# Altium PCB PCB1.PcbDoc
Units mil, origin at the board's own origin, x right, y up, seen from the top; angles counter-clockwise.
Board outline 2185.03 x 2735.03 mil, 4 copper layers (Top Layer, 5V, GND, Bottom Layer), stack 23.756 mil thick; 39 components, 28 nets, 132 pads, 51 vias.
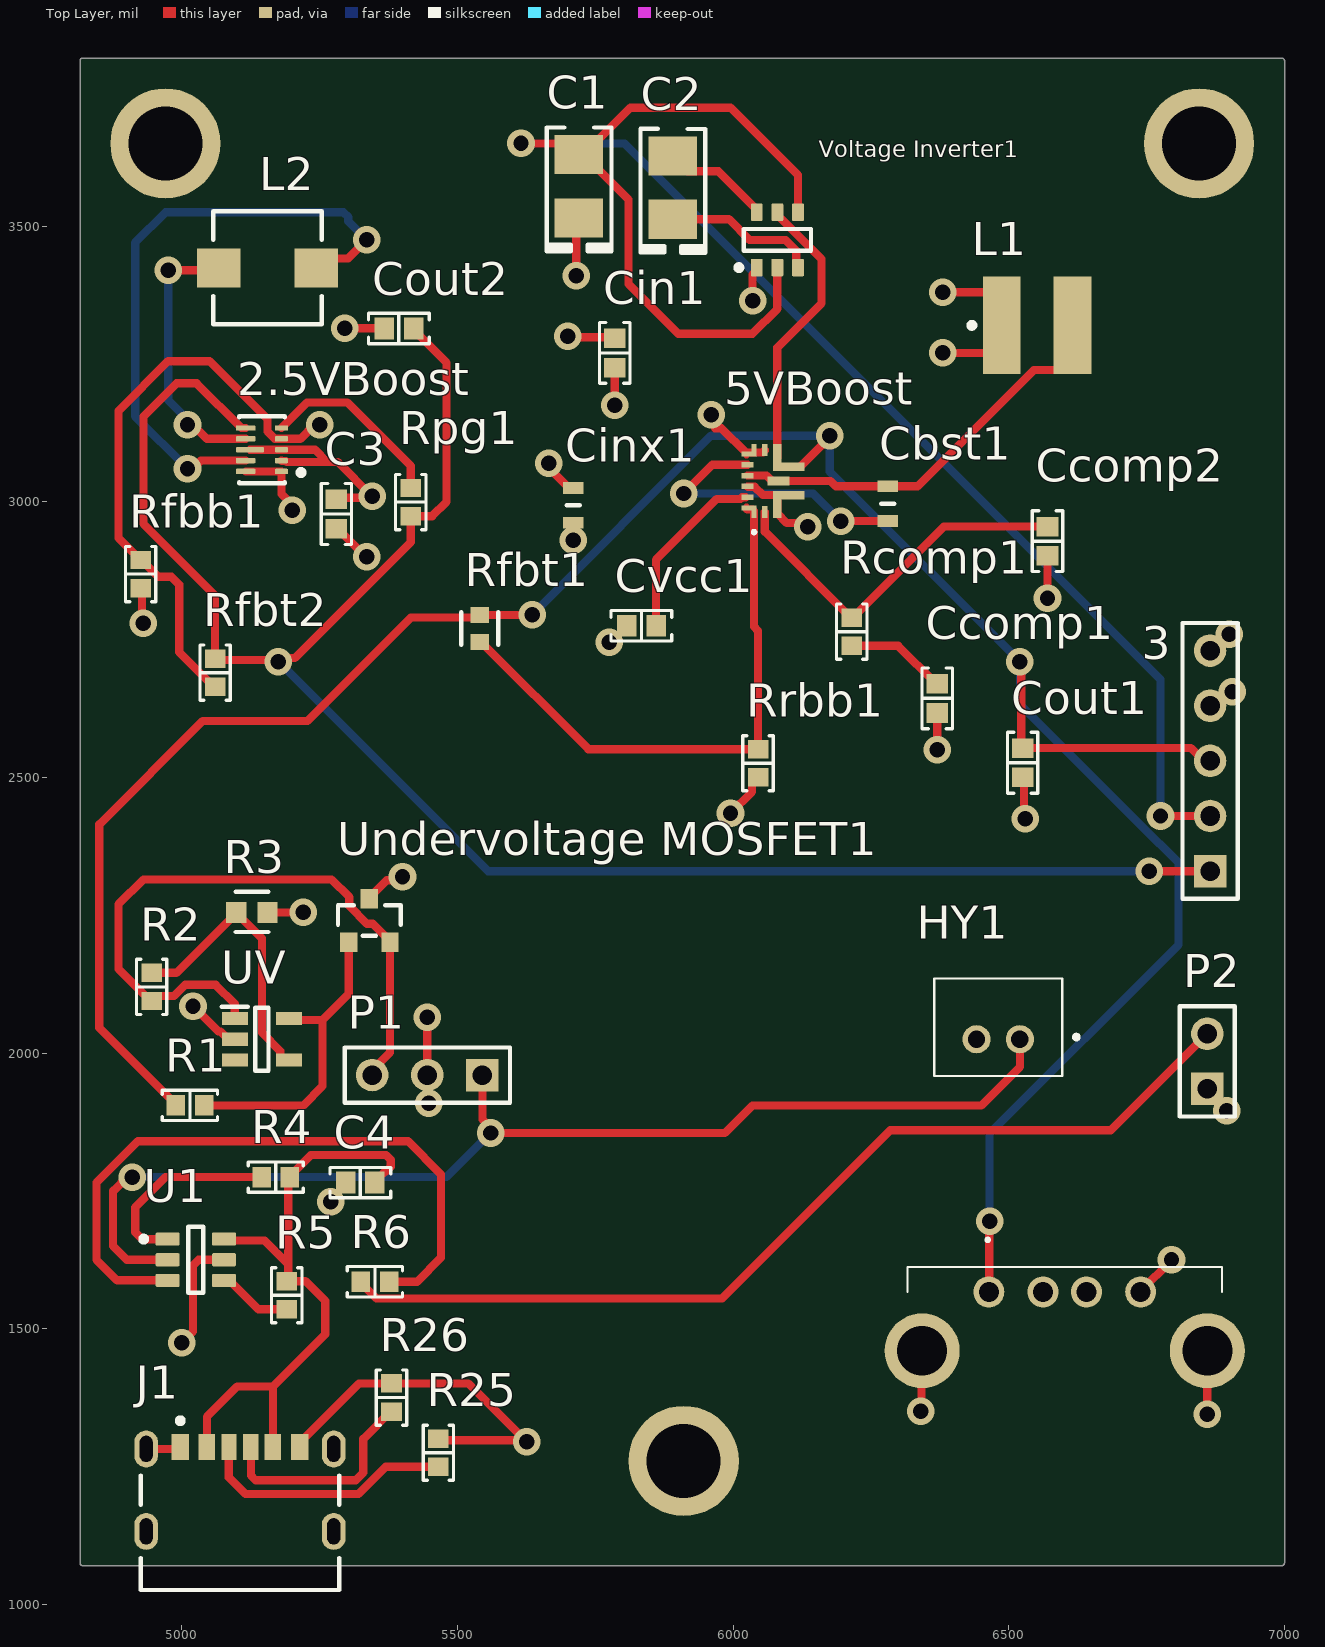
[diagram p0: Top Layer view]
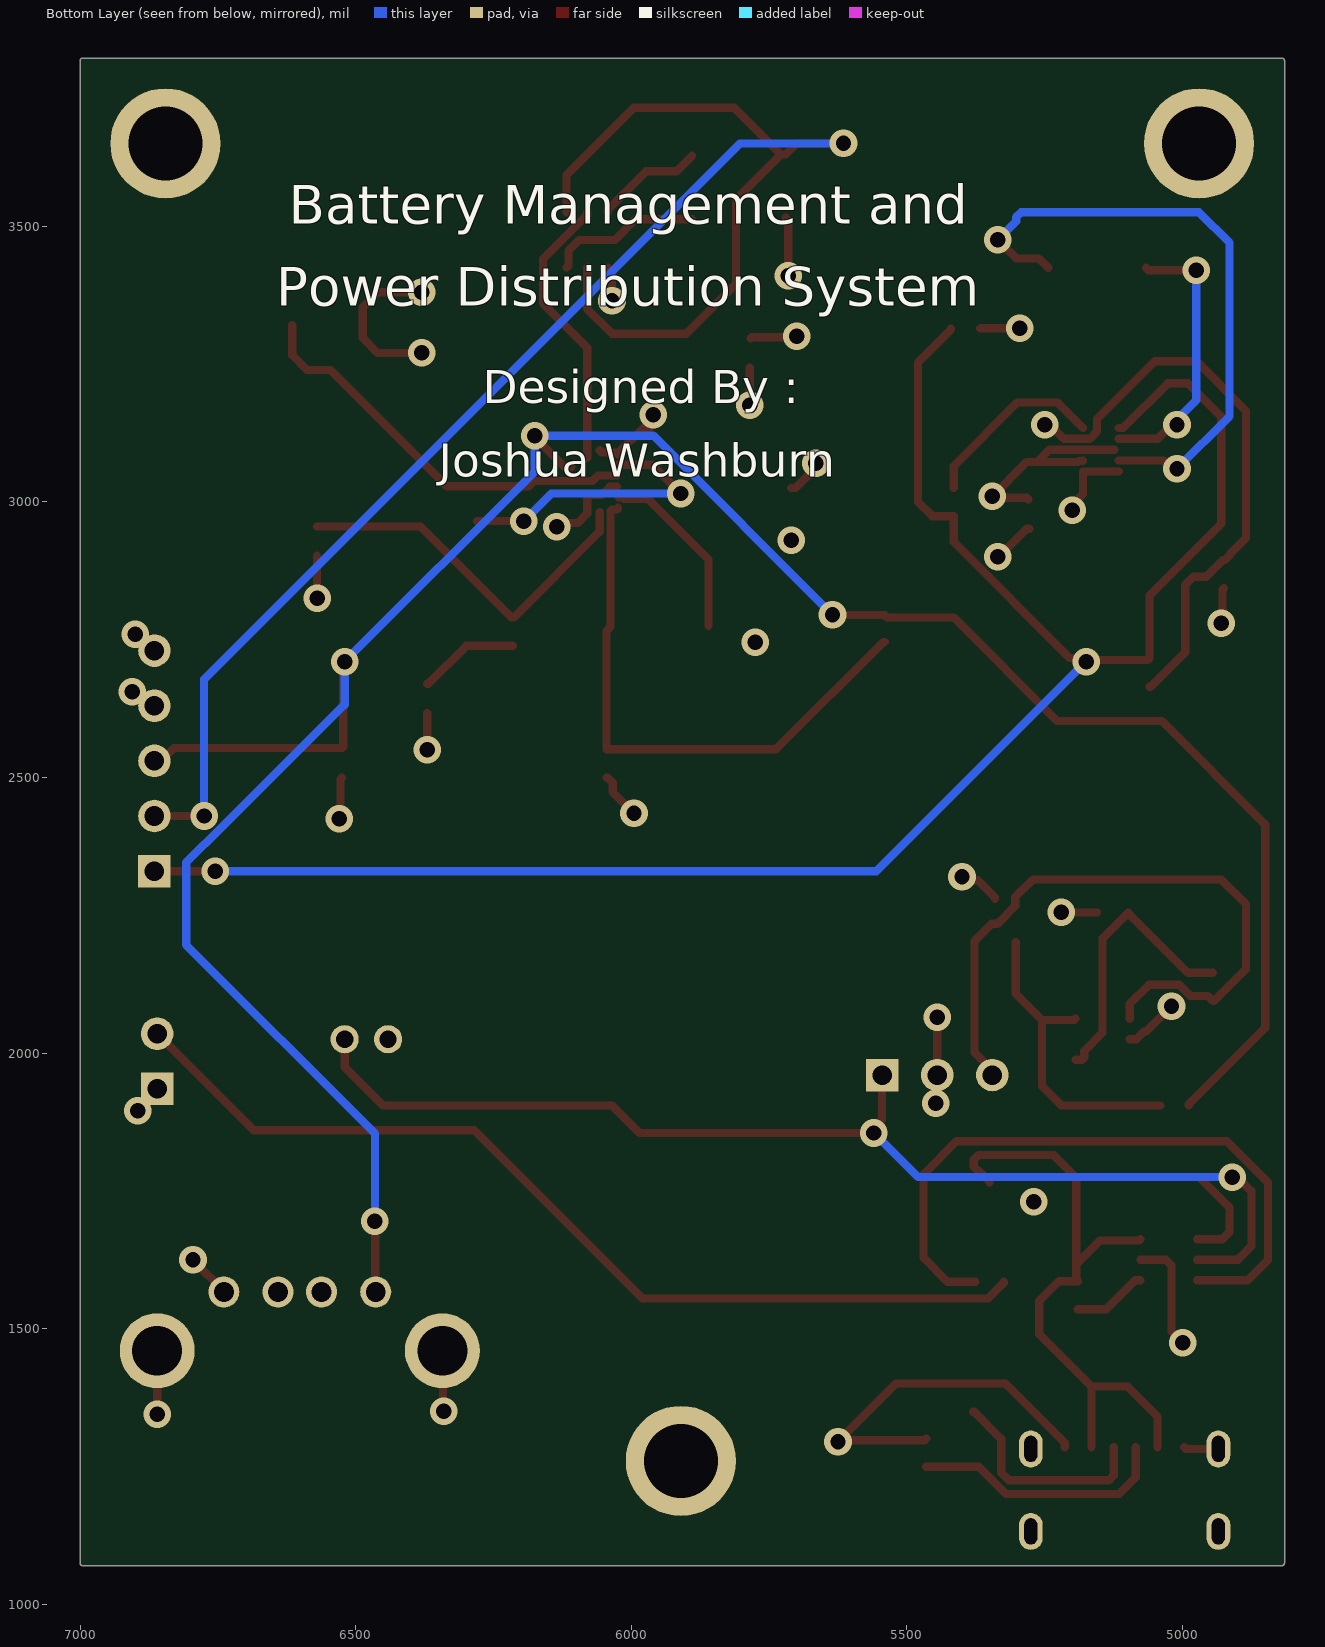
[diagram p1: Bottom Layer view, seen from below]
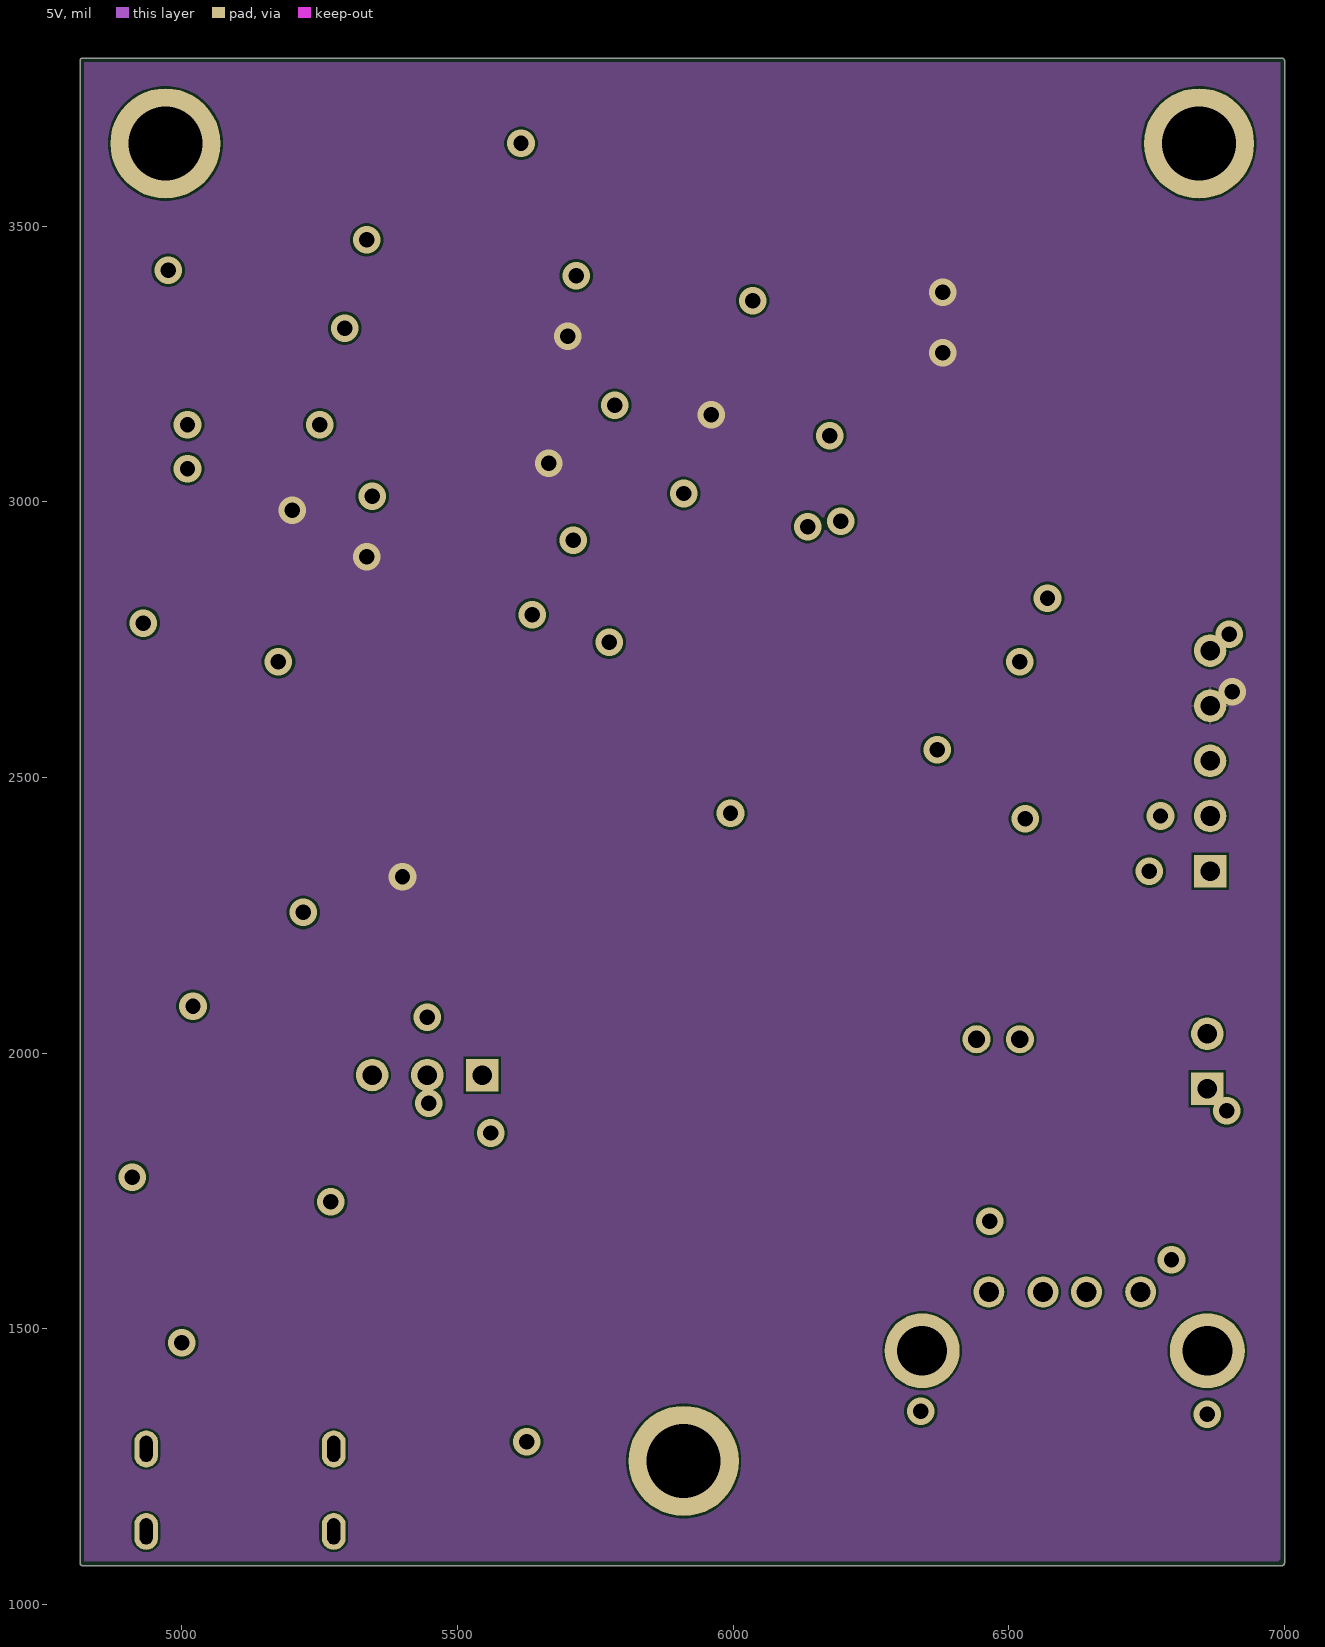
[diagram p2: 5V]
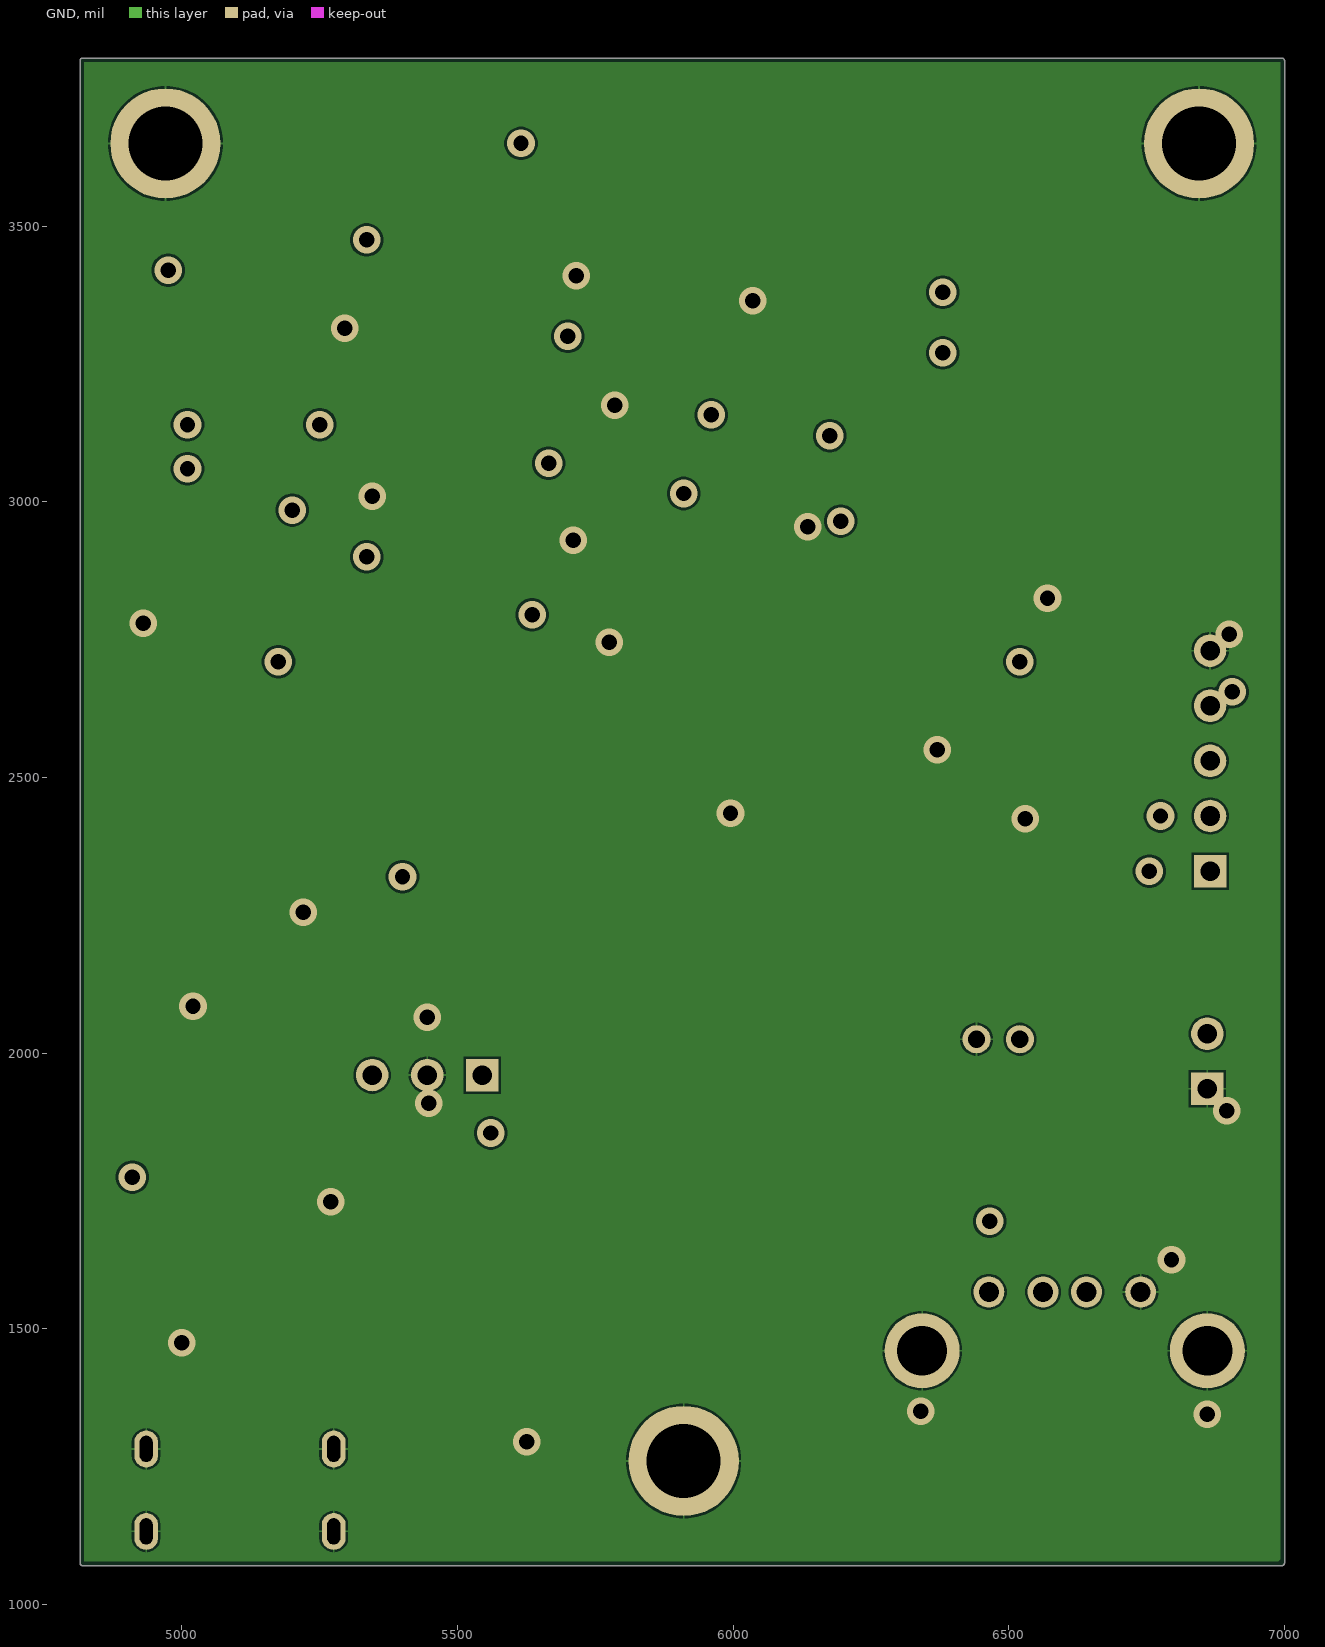
[diagram p3: GND]
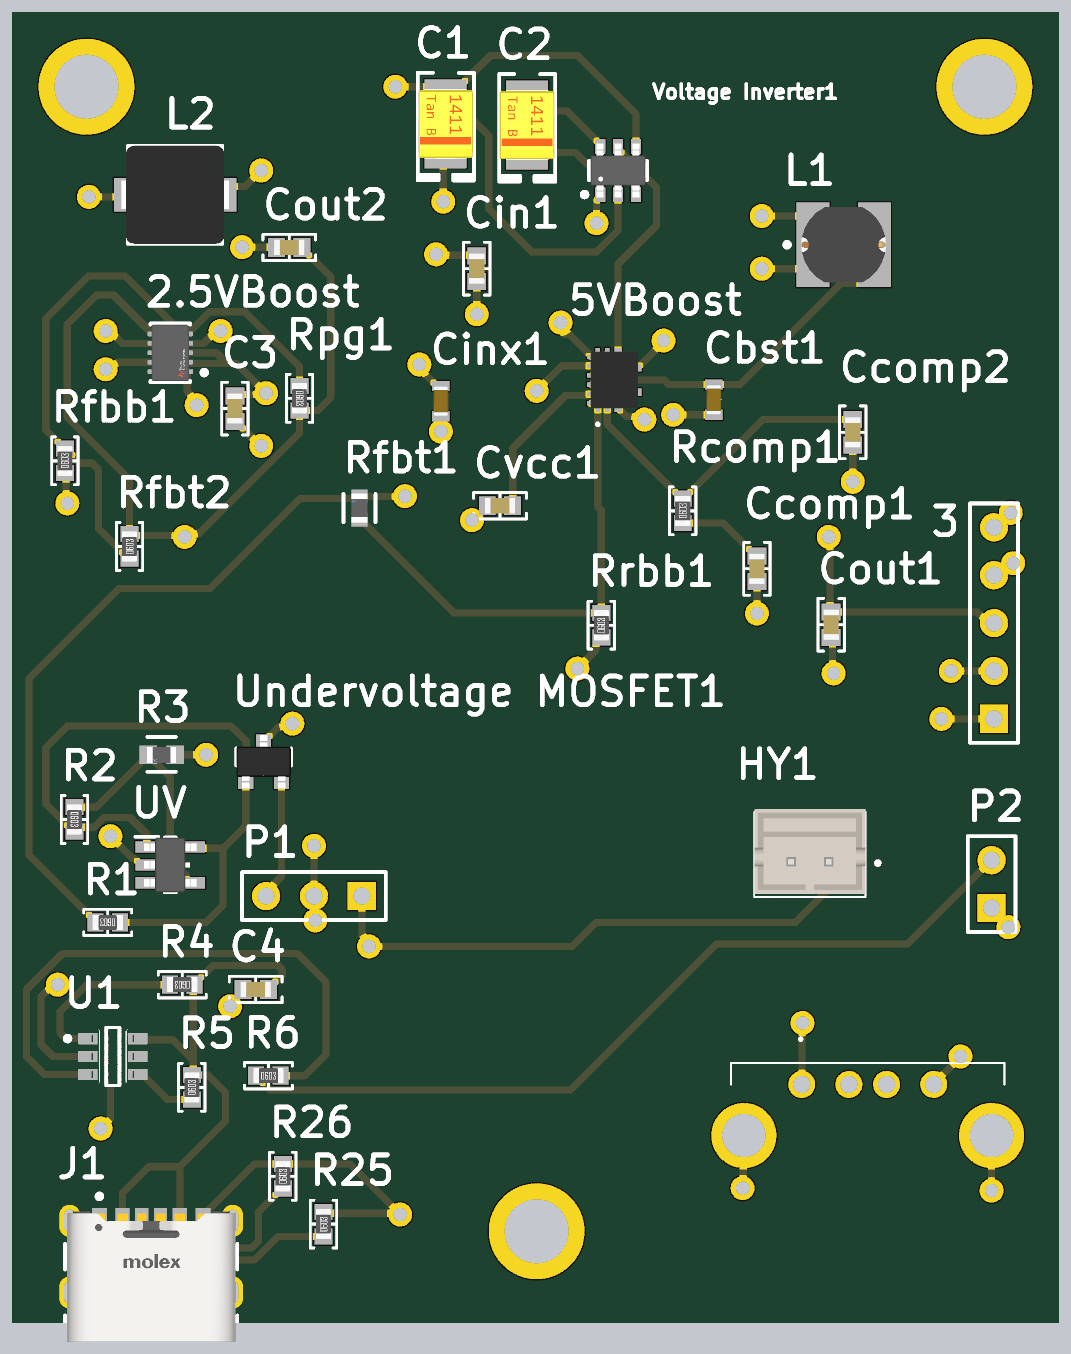
[diagram p4: 3D render of the assembled board from above, using the file's embedded part models]

## Layer stack, top to bottom
Top Solder: solder mask 0.4, Solder Resist, Dk 3.5
Top Layer: signal copper 1.4
Dielectric 2: prepreg 2.8, PP-006, Dk 4.1
5V: signal copper 1.378
Dielectric 1: dielectric 12.6, FR-4, Dk 4.8
GND: signal copper 1.378
Dielectric 3: prepreg 2.8, PP-006, Dk 4.1
Bottom Layer: signal copper 1.4
Bottom Solder: solder mask 0.4, Solder Resist, Dk 3.5

## Board outline
4814.98,1075 ccw(c4820,1075) 4820,1069.98 6959.96,1069.99 6970,1069.99 6960,1069.98 6995,1069.98 ccw(c6995,1075) 7000.01,1075 7000.02,3800 ccw(c6995,3800) 6995,3805.01 4820,3805.01 ccw(c4820,3800) 4814.98,3800

## Design rules (kind name [scope] priority, off if disabled: settings)
BoardOutlineClearance [All] p1: gap=7.87 ignorepadtopadclearanceinfootprint=FALSE
Clearance [All] p1: gap=4 ignorepadtopadclearanceinfootprint=FALSE except(5: Arc-Via Track-Via SMDPad-Via THPad-Via Via-Via Via-Fill Via-Poly Via-Region Via-Text; 9.84: Arc-Hole Track-Hole SMDPad-Hole THPad-Hole Via-Hole Fill-Hole Poly-Hole Region-Hole Text-Hole)
ComponentClearance [All] p1: gap=4 collisioncheckmode=3 verticalgap=4 showdistances=TRUE
DiffPairsRouting [All] p1: maxlimit=4 minlimit=4 mostfreqgap=4 toplayer_minwidth=4 toplayer_maxwidth=71497.94 toplayer_prefwidth=4 midlayer1_minwidth=4 midlayer1_maxwidth=71497.94 midlayer1_prefwidth=4 midlayer2_minwidth=4 midlayer2_maxwidth=71497.94 midlayer2_prefwidth=4 bottomlayer_minwidth=4 bottomlayer_maxwidth=71497.94 bottomlayer_prefwidth=4 maxuncoupledlength=500
Height [All] p1: minheight=0 maxheight=71497.94 prefheight=500
HoleSize [All] p1: absolutevalues=TRUE maxlimit=248.03 minlimit=7.87 maxpercent=80.000 minpercent=20.000
HoleToHoleClearance [All] p1: gap=9.84 allowstackedmicrovias=FALSE
MinimumAnnularRing [All] p1: minimumring=3
MinimumSolderMaskSliver [All] p1: minsoldermaskwidth=0
PlaneClearance [All] p1: clearance=4
PlaneConnect PlaneConnectPowerPads [InPadClass('PowerPads')] p1: planeconnectstyle=Direct reliefexpansion=20 reliefentries=4 reliefconductorwidth=10 reliefairgap=10
PlaneConnect [All] p2: pad.planeconnectstyle=Relief pad.reliefexpansion=11.81 pad.reliefentries=4 pad.reliefconductorwidth=4 pad.reliefairgap=4 via.planeconnectstyle=Direct via.reliefexpansion=11.81 via.reliefentries=4 via.reliefconductorwidth=5 via.reliefairgap=5
PolygonConnect PolygonConnectPowerPads [All vs (InPadClass('PowerPads'))] p1: connectstyle=Direct reliefconductorwidth=10 reliefentries=4 polygonreliefangle="90 Angle" airgapwidth=10
PolygonConnect [All] p2: thpad.connectstyle=Relief thpad.reliefconductorwidth=4 thpad.reliefentries=4 thpad.polygonreliefangle="90 Angle" thpad.airgapwidth=4 smdpad.connectstyle=Relief smdpad.reliefconductorwidth=4 smdpad.reliefentries=4 smdpad.polygonreliefangle="90 Angle" smdpad.airgapwidth=4 via.connectstyle=Direct via.reliefconductorwidth=5 via.reliefentries=4 via.polygonreliefangle="90 Angle" via.airgapwidth=5
RoutingVias [All] p1: holewidth=7.87 width=17.72 viastyle="Through Hole" minholewidth=7.87 minwidth=17.72 maxholewidth=248.03 maxwidth=257.87
SilkToSilkClearance [All] p1: silktosilkclearance=0
SilkToSolderMaskClearance [IsPad] p1: minsilkscreentomaskgap=4 clearancetoexposedcopper=TRUE
SolderMaskExpansion [All] p1: expansion=2.95 istentingtop=FALSE
SupplyNets "Schematic Supply Nets" [InNet('GND')] p1: voltage=0.000
Width [All] p1: maxlimit=71497.94 minlimit=4 preferedwidth=8 minimp=50.000000 maximp=50.000000 favimp=50.000000
20 further rules are at their usual default settings.

## Classes and differential pairs
component class U_Undervoltage: R1 R2 R3 UV
component class U_5VBoost: 5VBoost C1 C2 Cbst1 Ccomp1 Ccomp2 Cin1 Cinx1 Cout1 Cvcc1 L1 Rcomp1 Rfbt1 Rrbb1 "Voltage Inverter1"
component class U_2.5V: 2.5VBoost C3 Cout2 L2 Rfbb1 Rfbt2 Rpg1
component class Top: 3 C4 HY1 J1 P1 P2 R4 R5 R6 R25 R26 U1 "Undervoltage MOSFET1"

## Components (designator, comment, footprint, x,y, rotation, side; value= is the part's Value field where it differs from the comment)
2.5VBoost "TPS63802DLAR" FP-DLA0010A-MFG 5145,3094.41 r180 top
3 "Header 5" HDR1X5 6865,2330 r90 top
5VBoost "TPS61288RQQR" TPS61288RQQR 6072.13,3037.68 r90 top
C1 "SCTB335K16" "CAP POL 1411_3528" 5720,3572.52 r90 top value=3.3µF
C2 "SCTB335K16" "CAP POL 1411_3528" 5890,3570 r90 top value=3.3µF
C3 "CL10A226MPCNUBE" "CAP 0603_1608" 5280,2977.83 r270 top value="22 µF"
C4 "0603YC105MAT2A" "CAP 0603_1608" 5323.43,1765 r180 top value=1µF
Cbst1 "Capacitor 100nF 0603" CAPC1608X90N 6280,2996.5 r90 top
Ccomp1 "06035C393JAT2A" "CAP 0603_1608" 6370,2643.43 r90 top value=0.039µF
Ccomp2 "C0603C910J1GAC7867" "CAP 0603_1608" 6570,2928.43 r90 top value="91 pF"
Cin1 "06036D106KAT2A" "CAP 0603_1608" 5785,3270 r90 top value=10µF
Cinx1 "Capacitor 100nF 0603" CAPC1608X90N 5710,2993.5 r90 top
Cout1 "06036D476MAT2A" "CAP 0603_1608" 6525,2526.57 r90 top value=47µF
Cout2 "CL10A226MPCNUBE" "CAP 0603_1608" 5393.43,3314.41 r0 top value="22 µF"
Cvcc1 "0603YD225KAT2A" "CAP 0603_1608" 5833.43,2775 r0 top value=2.2µF
HY1 "B2B-PH-K-S__LF__SN_" B2BPHKSLFSN 6520,2025 r0 top
J1 "217175-0001" FP-217175-0001-MFG 5105.16,1165.71 r0 top
L1 "744773014" WE-PD2_4532 6551.02,3320 r0 top
L2 "SRP5030T-R47M" "BOURNS SRP5030T" 5155,3424.41 r0 top value="470 nH"
P1 "Header 3" HDR1X3 5545,1960 r180 top
P2 "Header 2" HDR1X2 6860,1935 r90 top
R1 "RR0816P-103-D" "RES 0603_1608" 5014.41,1905 r180 top value="10 kOhms"
R2 "RMCF0603FT2M05" "RES 0603_1608" 4945,2120 r270 top value="2.05 MOhms"
R3 "CRCW06031M54FKEA" FP-CRCW0603-e3-IPC_B 5126.83,2255 r180 top
R4 "RR0816P-103-D" "RES 0603_1608" 5170,1775 r180 top value="10 kOhms"
R5 "RK73H1JTTD6650F" "RES 0603_1608" 5190,1560.59 r90 top value="665 Ohms"
R6 "ERA-3AEB152V" "RES 0603_1608" 5350,1585 r0 top value="1.5 kOhms"
R25 "AC0603JR-075K1L" "RES 0603_1608" 5465,1275 r90 top value="5.1 kOhms"
R26 "AC0603JR-075K1L" "RES 0603_1608" 5380,1375 r90 top value="5.1 kOhms"
Rcomp1 "RT0603DRE0740K2L" "RES 0603_1608" 6215,2764.41 r90 top value="40.2 kOhms"
Rfbb1 "ERJ-PA3F9102V" "RES 0603_1608" 4925,2868.82 r90 top value="91 kOhms"
Rfbt1 "CRCW0603357KFKEA" FP-CRCW0603-e3-IPC_C 5540,2770 r90 top
Rfbt2 "RC0603FR-07365KL" "RES 0603_1608" 5060,2690 r90 top value="365 kOhms"
Rpg1 "RK73B1JTTD104J" "RES 0603_1608" 5415,2999.41 r270 top value="100 kOhms"
Rrbb1 "CPF0603F48K7C1" "RES 0603_1608" 6045,2525.59 r90 top value="48.7 kOhms"
U1 "BQ21040DBVR" FP-DBV0006A-MFG 5025,1625 r0 top
"Undervoltage MOSFET1" "DMG2305UX-7" "DIODES SOT-23-3" 5340,2240.63 r90 top
UV "TLV4051R2DBVR" SOT95P280X145-5N 5145,2025 r0 top
"Voltage Inverter1" "LM2664M6/NOPB" DBV0006A_L 6080,3475 r90 top

## Footprints (in the part's own frame and the unit in brackets; to place one, negate y for a bottom-side part, rotate by r counter-clockwise, add the part's x,y. Pads: shape width x height; smd on the part's side, far side on the other; paste and mask are expansions set on the pad)
B2BPHKSLFSN [mm]
  round 1.3 hole 0.8: 1(0,0) 2(-2,0)
  silkscreen extent -3.95,-1.7 2.7,2.8, body extent -3.95,-1.53 1.95,2.97, height 5.91
"BOURNS SRP5030T" [mm] "Precision Wire Wound Inductor, 2-Leads, Body 5.70x5.20mm, IPC Medium Density"
  rect 2x1.8 smd: 1(-2.25,0) 2(2.25,0)
  silkscreen extent -2.5,-2.6 2.5,2.6, body extent -2.85,-2.6 2.85,2.6, height 3
"CAP 0603_1608" [mm] "Chip Capacitor, 2-Leads, Body 1.60x0.80mm, IPC Medium Density"
  rect 0.9x1 smd: 1(-0.675,0) 2(0.675,0)
  silkscreen extent -1.4,-0.7 1.4,0.7, body extent -0.8,-0.41 0.8,0.41, height 0.82
"CAP POL 1411_3528" [mm] "Molded Capacitor, 2-Leads, Body 3.50x2.80mm, IPC Medium Density"
  rect 1.8x2.23 smd: 1(-1.46,0) 2(1.46,0)
  silkscreen extent -3,-1.5 2.71,1.48, body extent -1.87,-1.45 1.86,1.45, height 2
CAPC1608X90N [mm]
  rect 0.54x0.94 smd: 1(-0.8,0) 2(0.8,0)
  silkscreen extent 0,-0.3 0,0.3, body extent -0.8,-0.4 0.8,0.4, height 0.9
DBV0006A_L [mm] "SOT23, 6-Leads, Body 3.05x1.75mm, Pitch 0.95mm, IPC High Density"
  rrect18% 0.8x0.55 smd: 1(-1.275,0.95) 2(-1.275,0) 3(-1.275,-0.95) 4(1.275,-0.95) 5(1.275,0) 6(1.275,0.95)
  silkscreen extent -1.4,-1.55 0.5,1.9, body extent -1.42,-1.46 1.42,1.46, height 1.11
"DIODES SOT-23-3" [mm] "SOT23, 3-Leads, Body 2.90x2.40mm, Pitch 0.95mm, IPC Medium Density"
  rect 0.9x0.8 smd: 1(-1,0.95) 2(-1,-0.95) 3(1,0)
  silkscreen extent -0.7,-1.45 0.7,1.45, body extent -1.41,-1.45 1.41,1.45, height 1.5
FP-217175-0001-MFG [mm]
  rrect100% 1.1x1.7 hole 1.2 slot 0.6 at 0 deg paste-2539.97 mask+0: 1(-4.32,2.95) 2(4.32,2.95) 3(-4.32,-0.85) 4(4.32,-0.85)
  rect 0.7x1.2 smd paste+0 mask+0: A5(-0.5,3.03) B5(0.5,3.03)
  rect 0.76x1.2 smd paste+0 mask+0: A9(1.52,3.03) B9(-1.52,3.03)
  rect 0.8x1.2 smd paste+0 mask+0: A12(2.75,3.03) B12(-2.75,3.03)
  silkscreen extent -4.57,-3.55 4.57,4.37, body extent -4.97,-3.65 4.97,3.9, height 0.25
FP-CRCW0603-e3-IPC_B [mil]
  rect 36.81x37.88 smd paste+0 mask+0: 1(-28.17,0) 2(28.17,0)
  silkscreen extent -30,-37 30,35, body extent -56,-29 56,29, height 10
FP-CRCW0603-e3-IPC_C [mil]
  rect 28.94x33.94 smd paste+0 mask+0: 1(-24.23,0) 2(24.23,0)
  silkscreen extent -30,-33 30,33, body extent -43,-23 43,23, height 10
FP-DBV0006A-MFG [mm]
  rrect17% 1.1x0.6 smd paste+0 mask+0: 1(-1.3,0.95) 2(-1.3,0) 3(-1.3,-0.95) 4(1.3,-0.95) 5(1.3,0) 6(1.3,0.95)
  silkscreen extent -2.52,-1.53 0.35,1.53, body extent -1.95,-1.78 1.95,1.78, height 0.25
FP-DLA0010A-MFG [mm]
  rrect40% 0.6x0.25 smd paste+0 mask+0: 1(-0.9,1) 2(-0.9,0.5) 3(-0.9,0) 4(-0.9,-0.5) 5(-0.9,-1)
  rrect40% 0.9x0.25 smd paste+0 mask+0: 6(0.75,-1) 7(0.75,-0.5) 9(0.75,0.5) 10(0.75,1)
  rrect40% 1.3x0.25 smd paste-1000 mask+0: 8(0.55,0)
  silkscreen extent -1.92,-1.55 1.05,1.55, body extent -1.3,-1.65 1.3,1.65, height 0.25
HDR1X2 [mm] "Connector; Header; 2 Position"
  rect 1.5x1.5 hole 0.9: 1(0,0)
  round 1.5 hole 0.9: 2(2.54,0)
  silkscreen extent -1.27,-1.27 3.81,1.27
HDR1X3 [mm] "Connector; Header; 3 Position"
  rect 1.5x1.5 hole 0.9: 1(0,0)
  round 1.5 hole 0.9: 2(2.54,0) 3(5.08,0)
  silkscreen extent -1.27,-1.27 6.35,1.27
HDR1X5 [mm] "Connector; Header; 5 Position"
  rect 1.5x1.5 hole 0.9: 1(0,0)
  round 1.5 hole 0.9: 2(2.54,0) 3(5.08,0) 4(7.62,0) 5(10.16,0)
  silkscreen extent -1.27,-1.27 11.43,1.27
"RES 0603_1608" [mm] "Chip Resistor, 2-Leads, Body 1.60x0.80mm, IPC Medium Density"
  rect 0.85x0.95 smd: 1(-0.65,0) 2(0.65,0)
  silkscreen extent -1.27,-0.7 1.27,0.7, body extent -0.8,-0.4 0.8,0.4, height 0.45
SOT95P280X145-5N [mm]
  rect 1.2x0.6 smd: 1(-1.25,0.95) 2(-1.25,0) 3(-1.25,-0.95) 4(1.25,-0.95) 5(1.25,0.95)
  silkscreen extent -1.85,-1.45 0.3,1.5, body extent -1.4,-1.45 1.4,1.45, height 1.2
TPS61288RQQR [mm]
  rect 0.575x0.25 smd: 1(-1.413,0.875) 7(1.413,0.875)
  rect 0.55x0.25 smd: 2(-1.425,0.375) 6(1.425,0.375)
  rect 1.25x0.4 smd: 3(-1.075,-0.2) 5(1.075,-0.2)
  rect 0.4x1 smd: 4(0,-0.25)
  rect 0.25x0.55 smd: 8(0.75,1.175) 9(0.25,1.175) 10(-0.25,1.175) 11(-0.75,1.175)
  rect 0.225x0.45 smd: 12(-1.237,1.225) 15(1.237,1.225)
  rect 0.4x1.05 smd: 13(-0.65,-0.925) 14(0.65,-0.925)
  silkscreen extent -2.4,0.83 -2.3,0.92, body extent -1.5,-1.25 1.5,1.25, height 1
WE-PD2_4532 [mm] "SMD Power Inductor, 2-Leads, body 4.5x4mm"
  rect 1.75x4.5 smd: 1(-1.625,0) 2(1.625,0)
  silkscreen extent -3.12,-0.12 -2.87,0.12, body extent -2.25,-2 2.25,2, height 3.22

## Part data
2.5VBoost: library part CMP-04918-000005-1, "IC POWER MANAGEMENT", Manufacturer="Texas Instruments", Max Junction Temp=+125°C, Max Supply Voltage=5.5V, Min Supply Voltage=1.3V, Nominal Supply Current=11uA, Output Current=2A, Output Voltage=1.8-5.2V, Package=DLA0010A, Switching Frequency=1.4/1.6/2.1MHz, Temperature="-40°C to +125°C", Temperature Range Low=-40°C, Automotive=No, Category=IC, ComponentLink2Description=Datasheet, ComponentLink2URL=https://www.ti.com/lit/ds/symlink/tps63802.pdf, Device Class L1="Integrated Circuits (ICs)", Device Class L2="Power Management ICs", Device Class L3="Voltage Regulators - Switching", Digikey Description="IC POWER MANAGEMENT", Height=1mm, Lead Free=Yes, Manufacturer Part Number=TPS63802DLAR, Max Duty Cycle=100%, Mouser Description="2-A, high-efficient, 11-µA quiescent current buck-boost converter in QFN/DFN package 10-VSON-HR -40 to 125", Number Of Outputs=1, Octopart=https://octopart.com/tps63802dlar-texas+instruments-97359678, Output Type=AdjustableProgrammable, RoHS=TRUE, Standoff Height=0mm, Switching Topology=Buck-Boost, Temperature Range High=+125°C
3: library part CMP-002-000102-1, "Header, 5-Pin", Component Type=Standard, Design Item ID="Header 5", LatestRevisionDate=17-Jul-2002, LatestRevisionNote="Re-released for DXP Platform.", Pin Count=5, Publisher="Altium Limited", Source="Miscellaneous Connectors.SchLib"
5VBoost: "Integrated Circuit", Manufacturer_Name="Texas Instruments", Mouser Part Number=595-TPS61288RQQR, Arrow Part Number=TPS61288RQQR, Arrow Price/Stock=https://www.arrow.com/en/products/tps61288rqqr/texas-instruments?utm_currency=USD&region=nac, Datasheet Link=https://www.ti.com/lit/ds/symlink/tps61288.pdf?ts=1609351344517&ref_url=https%253A%252F%252Fwww.ti.com%252Fpower-management%252Fnon-isolated-dc-dc-switching-regulators%252Fstep-up-boost%252Fboost-converters-integrated-switch%252Fproducts.html, Height=1mm, Manufacturer_Part_Number=TPS61288RQQR, Mouser Price/Stock=https://www.mouser.co.uk/ProductDetail/Texas-Instruments/TPS61288RQQR?qs=eP2BKZSCXI7ZX8saYJkaIw%3D%3D
C1 C2: library part CMP-192-003656-1, "CAP-TANT SM 3.3UF 16V", Capacitance=3.3µF, Manufacturer="NTE Electronics, Inc", Manufacturer Size Code=B, Package / Case="1411 (3528 Metric), 1210", Tolerance=±10%, ComponentLink1Description=Datasheet, ComponentLink1URL=https://www.nteinc.com/capacitor_web/pdf/sct.pdf, ComponentLink2Description="DigiKey Link", ComponentLink2URL=http://digikey.com/product-detail/en/nte-electronics-inc/SCTB335K16/2368-SCTB335K16-ND/11646299, Features="General Purpose", Height - Seated (Max)="0.083\" (2.10mm)", lastupdated="8/30/2020 8:55:00 PM", Lifecycle Status=Active, Minimum Order=5, Mounting Type="Surface Mount", packaging=Bag, Part Number=SCTB335K16, partid=3657, price=0.56, series=SCT, Size / Dimension="0.138\" L x 0.110\" W (3.50mm x 2.80mm)", Type=Molded
C3 Cout2: library part CMP-184-000455-1, "CAP CER 22UF 10V X5R 0603", Capacitance="22 µF", Device Package="0603 (1608 Metric)", Manufacturer="Samsung Electro-Mechanics", Operating Temperature="-55°C ~ 85°C", Temperature Coefficient=X5R, Tolerance=±20%, Voltage - Rated=10V, Applications="General Purpose", ComponentLink1Description=Datasheet, ComponentLink1URL=http://www.samsungsem.com/kr/support/product-search/mlcc/CL10A226MPCNUBE.jsp, ComponentLink2Description="DigiKey Link", ComponentLink2URL=https://www.digikey.com/en/products/detail/samsung-electro-mechanics/CL10A226MPCNUBE/5960988, lastupdated="9/19/2022 1:01:15 PM", Lifecycle Status=Active, Minimum Order=1, Mounting Type="Surface Mount, MLCC", Package / Case="0603 (1608 Metric)", packaging=TapeAndReel, Part Number=CL10A226MPCNUBE, Part Status=Active, partid=3985, price=0.06, series=CL, Size / Dimension="0.063\" L x 0.031\" W (1.60mm x 0.80mm)", Thickness (Max)="0.037\" (0.95mm)"
C4: library part CMP-184-001549-1, "CAP CER 1UF 16V X7R 0603", Capacitance=1µF, Device Package="0603 (1608 Metric)", Manufacturer="AVX Corporation", Operating Temperature="-55°C ~ 125°C", Temperature Coefficient=X7R, Tolerance=±20%, Voltage - Rated=16V, Applications="General Purpose", ComponentLink1Description=Datasheet, ComponentLink1URL=http://datasheets.avx.com/X7RDielectric.pdf, ComponentLink2Description="DigiKey Link", ComponentLink2URL=http://digikey.com/product-detail/en/avx-corporation/0603YC105MAT2A/478-11645-1-ND/8564203, lastupdated="9/2/2020 1:03:24 AM", Lifecycle Status=Active, Minimum Order=1, Mounting Type="Surface Mount, MLCC", Package / Case="0603 (1608 Metric)", packaging=TapeAndReel, Part Number=0603YC105MAT2A, Part Status=Active, partid=8799, price=0.04, series=-, Size / Dimension="0.063\" L x 0.032\" W (1.60mm x 0.81mm)", Thickness (Max)="0.035\" (0.90mm)"
Cbst1 Cinx1: library part CMP-002-000221-3, "TDK - CGA3E2X7R1H104K080AA Multilayer Ceramic Capacitors MLCC - SMD/SMT CGA 0603 50V 0.1uF X7R 10% AEC-Q200", Manufacturer_Name=TDK, Manufacturer_Part_Number=CGA3E2X7R1H104K080AA, Mouser2 Part Number=810-CGA3E2X7R1H104K, Datasheet Link=https://componentsearchengine.com//CGA3E2X7R1H104K080AA.pdf, Design Item ID=CGA3E2X7R1H104K080AA, Height=0.9mm, Mouser2 Price/Stock=https://www.mouser.com/Search/Refine.aspx?Keyword=810-CGA3E2X7R1H104K, Source=CGA3E2X7R1H104K080AA.SchLib
Ccomp1: library part CMP-184-000491-1, "CAP CER 0.039UF 50V X7R 0603", Capacitance=0.039µF, Device Package="0603 (1608 Metric)", Manufacturer="AVX Corporation", Operating Temperature="-55°C ~ 125°C", Temperature Coefficient=X7R, Tolerance=±5%, Voltage - Rated=50V, Applications="General Purpose", ComponentLink1Description=Datasheet, ComponentLink1URL=http://datasheets.avx.com/X7RDielectric.pdf, ComponentLink2Description="DigiKey Link", ComponentLink2URL=http://digikey.com/product-detail/en/avx-corporation/06035C393JAT2A/478-10354-1-ND/6797293, lastupdated="9/2/2020 1:03:32 AM", Lifecycle Status=Active, Minimum Order=1, Mounting Type="Surface Mount, MLCC", Package / Case="0603 (1608 Metric)", packaging=TapeAndReel, Part Number=06035C393JAT2A, Part Status=Active, partid=4146, price=0.08, series=-, Size / Dimension="0.063\" L x 0.032\" W (1.60mm x 0.81mm)", Thickness (Max)="0.035\" (0.90mm)"
Ccomp2: library part CMP-184-001276-1, "CAP CER 91PF 100V C0G/NP0 0603", Capacitance="91 pF", Device Package="0603 (1608 Metric)", Manufacturer=KEMET, Operating Temperature="-55°C ~ 125°C", Temperature Coefficient="C0G, NP0", Tolerance=±5%, Voltage - Rated=100V, Applications="General Purpose", ComponentLink1Description=Datasheet, ComponentLink1URL=https://api.kemet.com/component-edge/download/datasheet/C0603C910J1GAC7867.pdf, ComponentLink2Description="DigiKey Link", ComponentLink2URL=https://www.digikey.com/en/products/detail/kemet/C0603C910J1GAC7867/7382113, Features="Low ESL", lastupdated="9/19/2022 1:01:05 PM", Lifecycle Status=Active, Minimum Order=1, Mounting Type="Surface Mount, MLCC", Package / Case="0603 (1608 Metric)", packaging=TapeAndReel, Part Number=C0603C910J1GAC7867, Part Status=Active, partid=7603, price=0.06, series="SMD Comm C0G", Size / Dimension="0.063\" L x 0.031\" W (1.60mm x 0.80mm)", Thickness (Max)="0.034\" (0.87mm)"
Cin1: library part CMP-184-001573-1, "CAP CER 10UF 6.3V X5R 0603", Capacitance=10µF, Device Package="0603 (1608 Metric)", Manufacturer="AVX Corporation", Operating Temperature="-55°C ~ 85°C", Temperature Coefficient=X5R, Tolerance=±10%, Voltage - Rated=6.3V, Applications="General Purpose", ComponentLink1Description=Datasheet, ComponentLink1URL=http://datasheets.avx.com/cx5r.pdf, ComponentLink2Description="DigiKey Link", ComponentLink2URL=http://digikey.com/product-detail/en/avx-corporation/06036D106KAT2A/478-7932-1-ND/3881555, lastupdated="9/2/2020 1:03:24 AM", Lifecycle Status=Active, Minimum Order=1, Mounting Type="Surface Mount, MLCC", Package / Case="0603 (1608 Metric)", packaging=TapeAndReel, Part Number=06036D106KAT2A, Part Status=Active, partid=8872, price=0.45, series=-, Size / Dimension="0.063\" L x 0.032\" W (1.60mm x 0.81mm)", Thickness (Max)="0.035\" (0.90mm)"
Cout1: library part CMP-184-002058-1, "CAP CER 47UF 6.3V X5R 0603", Capacitance=47µF, Device Package="0603 (1608 Metric)", Manufacturer="AVX Corporation", Operating Temperature="-55°C ~ 85°C", Temperature Coefficient=X5R, Tolerance=±20%, Voltage - Rated=6.3V, Applications="General Purpose", ComponentLink1Description=Datasheet, ComponentLink1URL=http://datasheets.avx.com/cx5r.pdf, ComponentLink2Description="DigiKey Link", ComponentLink2URL=http://digikey.com/product-detail/en/avx-corporation/06036D476MAT2A/478-11180-1-ND/7563130, lastupdated="9/2/2020 1:03:20 AM", Lifecycle Status=Active, Minimum Order=1, Mounting Type="Surface Mount, MLCC", Package / Case="0603 (1608 Metric)", packaging=TapeAndReel, Part Number=06036D476MAT2A, Part Status=Active, partid=11014, price=0.41, series=-, Size / Dimension="0.063\" L x 0.031\" W (1.60mm x 0.80mm)"
Cvcc1: library part CMP-184-002158-1, "CAP CER 2.2UF 16V X5R 0603", Capacitance=2.2µF, Device Package="0603 (1608 Metric)", Manufacturer="AVX Corporation", Operating Temperature="-55°C ~ 85°C", Temperature Coefficient=X5R, Tolerance=±10%, Voltage - Rated=16V, Applications="General Purpose", ComponentLink1Description=Datasheet, ComponentLink1URL=http://datasheets.avx.com/cx5r.pdf, ComponentLink2Description="DigiKey Link", ComponentLink2URL=http://digikey.com/product-detail/en/avx-corporation/0603YD225KAT2A/478-5147-1-ND/1913237, lastupdated="9/2/2020 1:03:19 AM", Lifecycle Status=Active, Minimum Order=1, Mounting Type="Surface Mount, MLCC", Package / Case="0603 (1608 Metric)", packaging=TapeAndReel, Part Number=0603YD225KAT2A, Part Status=Active, partid=11466, price=0.19, series=-, Size / Dimension="0.063\" L x 0.032\" W (1.60mm x 0.81mm)", Thickness (Max)="0.035\" (0.90mm)"
HY1: "Circulator or Directional Coupler", Manufacturer_Name="JST (JAPAN SOLDERLESS TERMINALS)", Manufacturer_Part_Number="B2B-PH-K-S (LF)(SN)", Datasheet Link=http://www.jst-mfg.com/product/pdf/eng/ePH.pdf, Height=6mm
J1: library part CMP-04767-000026-1, "CONN RCP USB2.0 C 6+18P SMD RA"
L1: library part CMP-0227-00478-2, Ambient Temperature Range High=85°C, Ambient Temperature Range Low=-40°C, Case/Package=Nonstandard, Current Rating=3.4A, DC Resistance (DCR)=22mΩ, Inductance=1.4µH, Inductance Tolerance=20%, Max Operating Temperature=125°C, Resistance=56mΩ, Saturation Current=5.04A, Self Resonant Frequency=103MHz, Test Frequency=10kHz, Composition=Wirewound, Core Material=Ferrite, Height=3.2mm, Height - Seated (Max)=3.5052mm, Lead Free="Lead Free", Length=4mm, Max DC Current=3.4A, Min Operating Temperature=-40°C, Mount="Surface Mount", NexarPartId=24533326, packaging=Digi-Reel®, REACH SVHC=Unknown, RMS Current (Irms)=3.4A, RoHS=Compliant, Shielding=Unshielded, Termination=SMD/SMT, Tolerance=20%, Width=4.5mm
L2: library part CMP-236-000004-1, "FIXED IND 470NH 12A 7.4 MOHM SMD", Current - Saturation=16A, Current Rating (Amps)="12 A", DC Resistance (DCR)="7.4mOhm Max", Device Package=Nonstandard, Inductance="470 nH", Inductance Frequency - Test="100 kHz", Manufacturer="Bourns Inc.", Operating Temperature="-40°C ~ 125°C", Tolerance=±20%, ComponentLink1Description=Datasheet, ComponentLink1URL=https://www.bourns.com/docs/Product-Datasheets/SRP5030T.pdf, ComponentLink2Description="DigiKey Link", ComponentLink2URL=https://www.digikey.com/en/products/detail/bourns-inc/SRP5030T-R47M/3986077, Height - Seated (Max)="0.118\" (3.00mm)", lastupdated="9/19/2022 1:52:24 PM", Lifecycle Status=Active, Material - Core="Iron Powder", Minimum Order=1, Mounting Type="Surface Mount", Package / Case=Nonstandard, packaging=TapeAndReel, Part Number=SRP5030T-R47M, Part Status=Active, partid=5, price=0.63, series=SRP5030T, Shielding=Shielded, Size / Dimension="0.224\" L x 0.205\" W (5.70mm x 5.20mm)", Type="Drum Core, Wirewound"
P1: library part CMP-002-000090-1, "Header, 3-Pin", Component Type=Standard, Design Item ID="Header 3", LatestRevisionDate=17-Jul-2002, LatestRevisionNote="Re-released for DXP Platform.", Pin Count=3, Publisher="Altium Limited", Source="Miscellaneous Connectors.SchLib"
P2: library part CMP-002-000070-1, "Header, 2-Pin", Component Type=Standard, Design Item ID="Header 2", LatestRevisionDate=17-Jul-2002, LatestRevisionNote="Re-released for DXP Platform.", Pin Count=2, Publisher="Altium Limited", Source="Miscellaneous Connectors.SchLib"
R1 R4: library part CMP-289-000281-1, "RES SMD 10K OHM 0.5% 1/16W 0603", Device Package="0603 (1608 Metric)", Manufacturer=Susumu, Operating Temperature="-55°C ~ 125°C", Power (Watts)="0.063W, 1/16W", Resistance="10 kOhms", Supplier Device Package=0603, Temperature Coefficient=±25ppm/°C, Tolerance=±0.5%, ComponentLink1Description=Datasheet, ComponentLink1URL=http://www.susumu.co.jp/common/pdf/n_catalog_partition05_en.pdf, ComponentLink2Description="DigiKey Link", ComponentLink2URL=https://www.digikey.com/en/products/detail/susumu/RR0816P-103-D/432209, Composition="Thin Film", Height - Seated (Max)="0.020\" (0.50mm)", lastupdated="9/19/2022 1:22:32 PM", Lifecycle Status=Active, Minimum Order=1, Number of Terminations=2, Package / Case="0603 (1608 Metric)", packaging=TapeAndReel, Part Number=RR0816P-103-D, Part Status=Active, partid=5458, price=0.01, series=RR, Size / Dimension="0.063\" L x 0.031\" W (1.60mm x 0.80mm)"
R2: library part CMP-289-001020-1, "RES 2.05M OHM 1% 1/10W 0603", Device Package="0603 (1608 Metric)", Manufacturer="Stackpole Electronics Inc", Operating Temperature="-55°C ~ 155°C", Power (Watts)="0.1W, 1/10W", Ratings=AEC-Q200, Resistance="2.05 MOhms", Supplier Device Package=0603, Temperature Coefficient=±200ppm/°C, Tolerance=±1%, ComponentLink1Description=Datasheet, ComponentLink1URL=https://www.seielect.com/catalog/sei-rmcf_rmcp.pdf, ComponentLink2Description="DigiKey Link", ComponentLink2URL=https://www.digikey.com/en/products/detail/stackpole-electronics-inc/RMCF0603FT2M05/1713706, Composition="Thick Film", Features="Automotive AEC-Q200", Height - Seated (Max)="0.022\" (0.55mm)", lastupdated="9/19/2022 1:22:26 PM", Lifecycle Status=Active, Minimum Order=1, Number of Terminations=2, Package / Case="0603 (1608 Metric)", packaging=CutTape, Part Number=RMCF0603FT2M05, Part Status=Active, partid=6967, price=0.01, series=RMCF, Size / Dimension="0.061\" L x 0.031\" W (1.55mm x 0.80mm)"
R3: library part CMP-02407-002537-1, "RES Thick Film, 1.54MΩ, 1%, 0.1W, 100ppm/°C, 0603", Case Code (Imperial)=0603, Case Code (Metric)=1608, Max Operating Temperature=155°C, Max Power Dissipation=100mW, Min Operating Temperature=-55°C, Package Quantity=10, Resistance=1.54MR, Temperature Coefficient=100ppm/°C, Tolerance=1%, Voltage Rating=75V, Case/Package=0603, Composition="Thick Film", Contact Plating=Tin, Depth=0.85mm, Features="Automotive AEC-Q200", Height=0.02inch, Lead Free="Lead Free", Length=1.55mm, Military Standard=Not, Number of Pins=2, Number of Terminations=2, packaging="Tape and Reel", Power Rating=100mW, Radiation Hardening=No, Termination=SMD/SMT, Voltage Rating (DC)=75V, Weight=7.1E-05oz, Width=0.85mm
R5: library part CMP-289-001928-1, "RES 665 OHM 1% 1/8W 0603", Device Package="0603 (1608 Metric)", Manufacturer="KOA Speer Electronics, Inc.", Operating Temperature="-55°C ~ 155°C", Power (Watts)="0.125W, 1/8W", Ratings=AEC-Q200, Resistance="665 Ohms", Supplier Device Package=0603, Temperature Coefficient=±100ppm/°C, Tolerance=±1%, ComponentLink1Description=Datasheet, ComponentLink1URL=http://www.koaspeer.com/catimages/Products/RK73H/RK73H.pdf, ComponentLink2Description="DigiKey Link", ComponentLink2URL=https://www.digikey.com/en/products/detail/koa-speer-electronics-inc/RK73H1JTTD6650F/9845256, Composition="Thick Film", Features="Automotive AEC-Q200, Moisture Resistant", Height - Seated (Max)="0.022\" (0.55mm)", lastupdated="9/19/2022 1:22:19 PM", Lifecycle Status=Active, Minimum Order=1, Number of Terminations=2, Package / Case="0603 (1608 Metric)", packaging=CutTape, Part Number=RK73H1JTTD6650F, Part Status=Active, partid=8803, price=0.01, series=RK73H, Size / Dimension="0.063\" L x 0.031\" W (1.60mm x 0.80mm)"
R6: library part CMP-289-000334-1, "RES SMD 1.5K OHM 0.1% 1/10W 0603", Device Package="0603 (1608 Metric)", Manufacturer="Panasonic Electronic Components", Operating Temperature="-55°C ~ 155°C", Power (Watts)="0.1W, 1/10W", Ratings=AEC-Q200, Resistance="1.5 kOhms", Supplier Device Package=0603, Temperature Coefficient=±25ppm/°C, Tolerance=±0.1%, ComponentLink1Description=Datasheet, ComponentLink1URL=https://industrial.panasonic.com/cdbs/www-data/pdf/RDM0000/AOA0000C307.pdf, ComponentLink2Description="DigiKey Link", ComponentLink2URL=https://www.digikey.com/en/products/detail/panasonic-electronic-components/ERA-3AEB152V/1465858, Composition="Thin Film", Features="Automotive AEC-Q200", Height - Seated (Max)="0.022\" (0.55mm)", lastupdated="9/19/2022 1:22:32 PM", Lifecycle Status=Active, Minimum Order=1, Number of Terminations=2, Package / Case="0603 (1608 Metric)", packaging=TapeAndReel, Part Number=ERA-3AEB152V, Part Status=Active, partid=5573, price=0.03, series=ERA-3A, Size / Dimension="0.063\" L x 0.031\" W (1.60mm x 0.80mm)"
R25 R26: library part CMP-289-001699-1, "RES SMD 5.1K OHM 5% 1/10W 0603", Device Package="0603 (1608 Metric)", Manufacturer=Yageo, Operating Temperature="-55°C ~ 155°C", Power (Watts)="0.1W, 1/10W", Ratings=AEC-Q200, Resistance="5.1 kOhms", Supplier Device Package=0603, Temperature Coefficient=±100ppm/°C, Tolerance=±5%, ComponentLink1Description=Datasheet, ComponentLink1URL=https://www.yageo.com/upload/media/product/productsearch/datasheet/rchip/PYu-AC_51_RoHS_L_7.pdf, ComponentLink2Description="DigiKey Link", ComponentLink2URL=https://www.digikey.com/en/products/detail/yageo/AC0603JR-075K1L/5896480, Composition="Thick Film", Features="Automotive AEC-Q200, Moisture Resistant", Height - Seated (Max)="0.022\" (0.55mm)", lastupdated="9/19/2022 1:22:21 PM", Lifecycle Status=Active, Minimum Order=1, Number of Terminations=2, Package / Case="0603 (1608 Metric)", packaging=CutTape, Part Number=AC0603JR-075K1L, Part Status=Active, partid=8336, price=0.01, series=AC, Size / Dimension="0.063\" L x 0.031\" W (1.60mm x 0.80mm)"
Rcomp1: library part CMP-289-002489-1, "RES SMD 40.2KOHM 0.5% 1/10W 0603", Device Package="0603 (1608 Metric)", Manufacturer=Yageo, Operating Temperature="-55°C ~ 155°C", Power (Watts)="0.1W, 1/10W", Resistance="40.2 kOhms", Supplier Device Package=0603, Temperature Coefficient=±50ppm/°C, Tolerance=±0.5%, ComponentLink1Description=Datasheet, ComponentLink1URL=https://www.yageo.com/upload/media/product/productsearch/datasheet/rchip/PYu-RT_1-to-0.01_RoHS_L_11.pdf, ComponentLink2Description="DigiKey Link", ComponentLink2URL=https://www.digikey.com/en/products/detail/yageo/RT0603DRE0740K2L/1074850, Composition="Thin Film", Height - Seated (Max)="0.022\" (0.55mm)", lastupdated="9/19/2022 1:22:15 PM", Lifecycle Status=Active, Minimum Order=1, Number of Terminations=2, Package / Case="0603 (1608 Metric)", packaging=TapeAndReel, Part Number=RT0603DRE0740K2L, Part Status=Active, partid=9988, price=0.01, series=RT, Size / Dimension="0.063\" L x 0.031\" W (1.60mm x 0.80mm)"
Rfbb1: library part CMP-289-001040-1, "RES SMD 91K OHM 1% 1/4W 0603", Device Package="0603 (1608 Metric)", Manufacturer="Panasonic Electronic Components", Operating Temperature="-55°C ~ 155°C", Power (Watts)="0.25W, 1/4W", Ratings=AEC-Q200, Resistance="91 kOhms", Supplier Device Package=0603, Temperature Coefficient=±100ppm/°C, Tolerance=±1%, ComponentLink1Description=Datasheet, ComponentLink1URL=https://industrial.panasonic.com/cdbs/www-data/pdf/RDO0000/AOA0000C331.pdf, ComponentLink2Description="DigiKey Link", ComponentLink2URL=https://www.digikey.com/en/products/detail/panasonic-electronic-components/ERJ-PA3F9102V/5035965, Composition="Thick Film", Features="Automotive AEC-Q200, Pulse Withstanding", Height - Seated (Max)="0.022\" (0.55mm)", lastupdated="9/19/2022 1:22:26 PM", Lifecycle Status=Active, Minimum Order=1, Number of Terminations=2, Package / Case="0603 (1608 Metric)", packaging=TapeAndReel, Part Number=ERJ-PA3F9102V, Part Status=Active, partid=7007, price=0.02, series=ERJ-PA3, Size / Dimension="0.063\" L x 0.031\" W (1.60mm x 0.80mm)"
Rfbt1: library part CMP-2000-03262-2, "RES Thick Film, 357kΩ, 1%, 0.1W, 100ppm/°C, 0603", Case Code (Imperial)=0603, Case Code (Metric)=1608, Max Operating Temperature=155°C, Max Power Dissipation=100mW, Min Operating Temperature=-55°C, Package Quantity=10, Resistance=357kR, Temperature Coefficient=100ppm/°C, Tolerance=1%, Voltage Rating=75V, Case/Package=0603, Composition="Thick Film", Contact Plating=Tin, Depth=0.85mm, Features="Automotive AEC-Q200", Height=0.45mm, Lead Free="Lead Free", Length=1.55mm, Military Standard=Not, Number of Pins=2, Number of Terminations=2, packaging="Tape and Reel", Power Rating=100mW, Radiation Hardening=No, Termination=Solder, Voltage Rating (DC)=75V, Weight=7.1E-05oz, Width=0.033inch
Rfbt2: library part CMP-289-001331-1, "RES 365K OHM 1% 1/10W 0603", Device Package="0603 (1608 Metric)", Manufacturer=Yageo, Operating Temperature="-55°C ~ 155°C", Power (Watts)="0.1W, 1/10W", Resistance="365 kOhms", Supplier Device Package=0603, Temperature Coefficient=±100ppm/°C, Tolerance=±1%, ComponentLink1Description=Datasheet, ComponentLink1URL=https://www.yageo.com/upload/media/product/productsearch/datasheet/rchip/PYu-RC_Group_51_RoHS_L_10.pdf, ComponentLink2Description="DigiKey Link", ComponentLink2URL=https://www.digikey.com/en/products/detail/yageo/RC0603FR-07365KL/727185, Composition="Thick Film", Features="Moisture Resistant", Height - Seated (Max)="0.022\" (0.55mm)", lastupdated="9/19/2022 1:22:24 PM", Lifecycle Status=Active, Minimum Order=1, Number of Terminations=2, Package / Case="0603 (1608 Metric)", packaging=CutTape, Part Number=RC0603FR-07365KL, Part Status=Active, partid=7601, price=0.01, series=RC_L, Size / Dimension="0.063\" L x 0.031\" W (1.60mm x 0.80mm)"
Rpg1: library part CMP-289-000475-1, "RES 100K OHM 5% 1/10W 0603", Device Package="0603 (1608 Metric)", Manufacturer="KOA Speer Electronics, Inc.", Operating Temperature="-55°C ~ 155°C", Power (Watts)="0.1W, 1/10W", Ratings=AEC-Q200, Resistance="100 kOhms", Supplier Device Package=0603, Temperature Coefficient=±200ppm/°C, Tolerance=±5%, ComponentLink1Description=Datasheet, ComponentLink1URL=http://www.koaspeer.com/catimages/Products/RK73B/RK73B.pdf, ComponentLink2Description="DigiKey Link", ComponentLink2URL=https://www.digikey.com/en/products/detail/koa-speer-electronics-inc/RK73B1JTTD104J/9844700, Composition="Thick Film", Features="Automotive AEC-Q200", Height - Seated (Max)="0.022\" (0.55mm)", lastupdated="9/19/2022 1:22:31 PM", Lifecycle Status=Active, Minimum Order=1, Number of Terminations=2, Package / Case="0603 (1608 Metric)", packaging=CutTape, Part Number=RK73B1JTTD104J, Part Status=Active, partid=5870, price=0.01, series=RK73B, Size / Dimension="0.063\" L x 0.031\" W (1.60mm x 0.80mm)"
Rrbb1: library part CMP-289-001065-1, "RES SMD 48.7K OHM 1% 1/16W 0603", Device Package="0603 (1608 Metric)", Manufacturer="TE Connectivity Passive Product", Operating Temperature="-55°C ~ 155°C", Power (Watts)="0.063W, 1/16W", Resistance="48.7 kOhms", Supplier Device Package=0603, Temperature Coefficient=±50ppm/°C, Tolerance=±1%, ComponentLink1Description=Datasheet, ComponentLink1URL=https://www.te.com/commerce/DocumentDelivery/DDEController?Action=srchrtrv&DocNm=1773200&DocType=DS&DocLang=English, ComponentLink2Description="DigiKey Link", ComponentLink2URL=https://www.digikey.com/en/products/detail/te-connectivity-passive-product/CPF0603F48K7C1/2384648, Composition="Thin Film", Height - Seated (Max)="0.022\" (0.55mm)", lastupdated="9/19/2022 1:22:26 PM", Lifecycle Status=Active, Minimum Order=1, Number of Terminations=2, Package / Case="0603 (1608 Metric)", packaging=TapeAndReel, Part Number=CPF0603F48K7C1, Part Status=Active, partid=7053, price=0.02, series="CPF, Neohm", Size / Dimension="0.061\" L x 0.031\" W (1.55mm x 0.80mm)"
U1: library part CMP-04911-000045-1, "IC BATT CHG LI-ION 1CELL SOT23-6", Battery Pack Voltage=4.2V, Case/Package=SOT-23-6, Max Charge Current=800mA, Max Operating Temperature=125°C, Max Supply Voltage=6.45V, Min Operating Temperature=0°C, Differential Output=No, Fault Protection="Over Voltage", Interface=USB, Lead Free="Lead Free", Mount="Surface Mount", Number of Bits=16, Number of Cells=1, Number of D/A Converters=4, Output Type="Analog Current/Voltage", packaging="Cut Tape", RoHS Compliant=Yes, Settling Time=30us
"Undervoltage MOSFET1": library part CMP-258-000005-1, "MOSFET P-CH 20V 4.2A SOT23", Current - Continuous Drain (Id) @ 25°C="4.2A (Ta)", Drain to Source Voltage (Vdss)=20V, Drive Voltage (Max Rds On,  Min Rds On)="1.8V, 4.5V", Input Capacitance (Ciss) (Max) @ Vds="808pF @ 15V", Manufacturer="Diodes Incorporated", Operating Temperature="-55°C ~ 150°C (TJ)", Package / Case="TO-236-3, SC-59, SOT-23-3", Power Dissipation (Max)="1.4W (Ta)", Supplier Device Package=SOT-23, ComponentLink1Description=Datasheet, ComponentLink1URL=https://www.diodes.com/assets/Datasheets/DMG2305UX.pdf, ComponentLink2Description="DigiKey Link", ComponentLink2URL=http://digikey.com/product-detail/en/diodes-incorporated/DMG2305UX-7/DMG2305UX-7DICT-ND/4340665, FET Type=P-Channel, Gate Charge (Qg) (Max) @ Vgs="10.2nC @ 4.5V", lastupdated="9/19/2022 2:00:16 PM", Lifecycle Status=Active, Minimum Order=1, Mounting Type="Surface Mount", packaging=TapeAndReel, Part Number=DMG2305UX-7, Part Status=Active, price=0.07, Rds On (Max) @ Id, Vgs="52mOhm @ 4.2A, 4.5V", series=-, Technology="MOSFET (Metal Oxide)", Vgs (Max)=±8V, Vgs(th) (Max) @ Id="900mV @ 250µA"
UV: "Integrated Circuit", Manufacturer_Name="Texas Instruments", Datasheet Link=https://www.ti.com/product/TLV4051, Height=1.45mm, Manufacturer_Part_Number=TLV4051R2DBVR
"Voltage Inverter1": library part CMP-0065-00094-3, "Switched Capacitor Voltage Converter, 6-pin SOT-23, Pb-Free", Manufacturer="Texas Instruments", PackageTopMarking=S03A*XTT, PowerWise=N, Code_IPC=SOT26A-6, Code_JEDEC=MO-178-AB, ComponentLink1Description="Datasheet URL", ComponentLink1URL=http://www.ti.com/general/docs/lit/getliterature.tsp?genericPartNumber=LM2664&fileType=pdf, CompType="Switch Caps", PackageDescription="Molded SOT-23, .115 x .063 x .040in Body, 6 Lead, .0375in in Pitch", PackageReference=DBV0006A, PinCount=6, RoHS=Y

## Free pads (board coordinates)
  round 56.34 hole 36.22: 1(6463.54,1566.69) 2(6561.97,1566.69) 3(6640.71,1566.69) 4(6739.13,1566.69)
  round 200 hole 133.86: 46(4970,3650) 46(5910,1260) 46(6845,3650)
  round 135.83 hole 90.55: MH1(6342.68,1460) MH2(6860,1460)

## Via types
v1: diameter 50, hole 28, Top Layer to Bottom Layer, 51 vias

## Nets (pads, with @x,y where several pads share a name; then routed paths per layer and width w, separated by ;. In a path a pad name is that pad's centre, name@x,y a point inside that pad or via, vN(x,y) a via of type N, cw(c..) or ccw(c..) an arc to the next point about the centre after c; other vN are vias at no path point)
BST: 5VBoost.8 Cbst1.1 | length 528.2
  Top Layer w15: v1(5910,3015) 5962.2,3067.2 5VBoost.8 ; v1(6195,2965) Cbst1.1
  Bottom Layer w15: v1(5910,3015) 6145,3015 v1(6195,2965)
COMP: 5VBoost.2 Ccomp2.2 Rcomp1.2 | length 679.4
  Top Layer w15: 5VBoost.2 6057.36,2945.67 6213.03,2790 Rcomp1.2 ; Rcomp1.2@6216.97,2790 6381.97,2955 Ccomp2.2
FB: 5VBoost.1 5VBoost.12 Rfbt1.1 Rrbb1.2 | length 1037.9
  Top Layer w15: Rfbt1.1 5542.5,2745.77 5737.09,2551.18 Rrbb1.2 6045,2766 6037.68,2773.32 5VBoost.1 6037.68,2983.29 6035.1,2985.87 6027.01,2985.87 6026.97,2985.91 6025.26,2985.91 6023.9,2987.26 5VBoost.12
GND: 2.5VBoost.2 2.5VBoost.3 2.5VBoost.8 3.5 5VBoost.3 5VBoost.10 5VBoost.13 "Voltage Inverter1.1" C1.1 C3.1 C4.2 Ccomp1.1 Ccomp2.1 Cin1.1 Cinx1.1 Cout1.1 Cout2.1 Cvcc1.1 HY1.2 J1.1 J1.2 J1.3 J1.4 J1.A12 J1.B12 P1.2 P2.1 pad.4 pad.46 pad.MH1 pad.MH2 R3.1 R25.2 R26.2 Rfbb1.1 Rrbb1.1 U1.5 UV.2 | length 2775.6
  Top Layer w15: Rfbb1.1 4927.5,2840.73 4927.5,2782.5 v1(4930,2780) ; J1.1 4993.74,1281.85 J1.B12 ; v1@5002.93,1471.09 v1(4999.51,1474.51) 5020,1495 5020,1615 5030,1625 U1.5 ; v1(5020,2085) 5065.91,2039.09 5069.89,2039.09 5083.98,2025 UV.2 ; 2.5VBoost.8 2.5VBoost.3 5241.12,3094.41 5263.17,3072.36 ; R3.1 v1(5220,2255) ; 2.5VBoost.2 5181.12,3074.04 5188.3,3074.04 5189.98,3072.36 5263.17,3072.36 ; J1.A12 5213.43,1292.87 5321.14,1400.59 R26.2 5519.41,1400.59 v1(5625,1295) 5622.2,1297.8 5467.8,1297.8 R25.2 ; C3.1 5282.8,3007.2 5342.2,3007.2 v1(5345,3010) 5282.64,3072.36 5263.17,3072.36 ; v1(5295,3315) 5295.3,3314.7 5366.56,3314.7 Cout2.1 ; P1.2 v1(5445,2065) ; v1(5715,3410) 5715,3510.04 C1.1 ; v1(5785,3175) Cin1.1 ; v1(5995,2435) 6033.8,2473.8 6033.8,2490.77 6043.03,2500 Rrbb1.1 ; 5VBoost.10 6026.55,3027.15 6038.88,3027.15 6053.57,3012.46 6079.63,3012.46 6080,3012.09 5VBoost.3 6080,2978.62 6096.93,2961.7 6128.3,2961.7 v1(6135,2955) ; v1(6035,3365) 6035,3412.28 6042.6,3419.88 6042.6,3424.8 ; v1(6340,1350) 6341.34,1351.34 6341.34,1458.66 pad.MH1 ; v1(6370,2550) Ccomp1.1 ; Cout1.1 6527.5,2497.5 6527.5,2427.5 v1(6530,2425) ; v1(6570,2825) Ccomp2.1 ; pad.4 6739.13,1567.91 6795,1623.78 v1(6795,1625) ; v1(6860,1345) pad.MH2
  other v1: 5270,1730 6895,1895 5447.95,1909.14 5775,2745 6900,2760 5710,2930
Net2.5VBoost_4: 2.5VBoost.4 Rfbb1.2 Rfbt2.1 | length 1073
  Top Layer w15: Rfbb1.2 4923.03,2894.41 4913.8,2903.64 4913.8,2905.61 4885,2934.41 4885,3165 4975,3255 5050,3255 5155.01,3149.99 5155.01,3127.36 5168.28,3114.09 5214.74,3114.09 5240.65,3140 v1(5250,3140) ; Rfbb1.2@4926.97,2894.41 4957.41,2863.96 4981.04,2863.96 4995,2850 4995,2727.44 5058.03,2664.41 Rfbt2.1
Net2.5VBoost_5: 2.5VBoost.5 Rpg1.1 | length 341.3
  Top Layer w15: 2.5VBoost.5 5226.65,3180 5300,3180 5415,3065 Rpg1.1
Net2.5VBoost_6: 2.5VBoost.6 3.1 Cout2.2 Rfbt2.2 Rpg1.2 | length 3493.8
  Top Layer w15: 2.5VBoost.6 5107.83,3133.78 5026.61,3215 4990,3215 4930,3155 4930,2960 5060,2830 Rfbt2.2 5062.8,2712.8 5172.2,2712.8 v1(5175,2710) 5181.7,2716.7 5204.73,2716.7 5415,2926.97 Rpg1.2 5453.82,2973.82 5480,3000 5480,3252.44 5420,3312.44 Cout2.2 ; v1(6755,2330) 3.1
  Bottom Layer w15: v1(5175,2710) 5555,2330 v1(6755,2330)
Net2.5VBoost_7: 2.5VBoost.7 L2.1 | length 503.9
  Top Layer w15: v1(4975,3420) 5062.01,3420 L2.1 ; v1(5010,3140) 5019.47,3140 5045.38,3114.09 2.5VBoost.7
  Bottom Layer w15: v1(4975,3420) 4975,3184.47 5010,3149.47 v1(5010,3140)
Net2.5VBoost_9: 2.5VBoost.9 L2.2 | length 1141.4
  Top Layer w15: v1(5010,3060) 5019.47,3060 5034.2,3074.72 2.5VBoost.9 ; L2.2 5260.59,3441.41 5301.41,3441.41 v1(5335,3475)
  Bottom Layer w15: v1(5010,3060) 4915,3155 4915,3470 4970,3525 5292.86,3525 5301.65,3516.21 5301.65,3508.83 5335,3475.48 v1(5335,3475)
Net3_2: 3.2 "Voltage Inverter1.2" "Voltage Inverter1.4" C1.2 | length 3234.1
  Top Layer w15: v1(5615,3650) 5700,3650 C1.2 C1.2@5728.46,3630 ; 6080,3424.8 6080,3350 6035,3305 5900,3305 5810,3395 5810,3548.46 C1.2@5728.46,3630 ; 6117.4,3525.2 6117.4,3592.6 5995,3715 5813.46,3715 C1.2@5728.46,3630 ; v1(6775,2430) 3.2
  Bottom Layer w15: v1(5615,3650) 5803.03,3650 6775,2678.03 v1(6775,2430)
NetC2_1: "Voltage Inverter1.3" C2.1 | length 280
  Top Layer w15: C2.1 5991.94,3512.52 6029.46,3475 6095,3475 6114.07,3455.93 6114.07,3428.13 6117.4,3424.8
NetC2_2: "Voltage Inverter1.6" C2.2 | length 197.8
  Top Layer w15: C2.2 5917.93,3599.55 5973.17,3599.55 6042.6,3530.12 6042.6,3525.2
NetCcomp1_2: Ccomp1.2 Rcomp1.1 | length 183.5
  Top Layer w15: Rcomp1.1 6299.21,2738.82 6368.03,2670 Ccomp1.2
NetHY1_1: HY1.1 P1.1 U1.2 | length 2108.6
  Top Layer w15: v1(4910,1775) 4900.53,1775 4875.53,1750 4875,1750 4875,1650 4900,1625 U1.2 ; P1.1 5545,1879.47 5560,1864.47 v1(5560,1855) 5984.74,1855 6034.74,1905 6450,1905 6520,1975 HY1.1
  Bottom Layer w15: v1(4910,1775) 5480,1775 v1(5560,1855)
NetJ1_A5: J1.A5 R25.1 | length 468.1
  Top Layer w15: J1.A5 5085,1284.53 5085,1230 5115,1200 5320,1200 5369.41,1249.41 R25.1
NetJ1_B5: J1.B5 R26.1 | length 397.4
  Top Layer w15: J1.B5 5125,1284.84 5125,1233.79 5133.79,1225 5315,1225 5328.88,1238.88 5328.88,1300.26 5378.03,1349.41 R26.1
NetP1_3: "Undervoltage MOSFET1.2" P1.3 R2.2 UV.1 | length 1229
  Top Layer w15: UV.1 5095.79,2089.21 5061.21,2123.79 5005.75,2123.79 4985.61,2103.64 4954.23,2103.64 R2.2 4943.03,2094.41 4885,2152.44 4885,2270 4930,2315 5271.21,2315 5303.49,2282.72 5303.49,2266.78 5335.77,2234.5 5346.13,2234.5 5377.4,2203.23 5377.4,2201.26 5377.4,2001.18 5345,1968.78 P1.3
NetP2_2: P2.2 R6.1 | length 1748.2
  Top Layer w15: R6.1 5324.41,1583.03 5352.64,1554.8 5979.8,1554.8 6285,1860 6685,1860 P2.2
NetR1_1: "Undervoltage MOSFET1.1" R1.1 UV.5 | length 572.3
  Top Layer w15: R1.1 5220,1905 5255,1940 5255,2060 ; UV.5 5196.61,2060 5255,2060 ; 5302.6,2201.26 5302.6,2107.6 5255,2060
NetR2_1: R2.1 R3.2 UV.4 | length 512.1
  Top Layer w15: R2.1 4989.79,2145.59 5098.67,2254.47 5145,2208.14 5145,2036.81 5178.09,2003.72 5178.09,1991.91 5182.4,1987.6 UV.4
NetR4_2: R4.2 U1.1 | length 361.2
  Top Layer w15: U1.1 4927.6,1662.4 4915,1675 4915,1720 4970,1775 R4.2
NetR5_1: R5.1 U1.4 | length 135.6
  Top Layer w15: U1.4 5086.02,1587.6 5138.62,1535 R5.1
NetR6_2: R6.2 U1.3 | length 1229
  Top Layer w15: U1.3 4882.4,1587.6 4845,1625 4845,1765 4920,1840 5410,1840 5470,1780 5470,1628.79 5426.21,1585 R6.2
SW: 5VBoost.4 5VBoost.9 Cbst1.2 L1.2 | length 749.9
  Top Layer w15: 5VBoost.9 6060.31,3047.52 6070.16,3037.68 5VBoost.4 6176.55,3037.68 6186.23,3027.99 Cbst1.2 6334.33,3027.99 6545.26,3238.92 6588.05,3238.92 6615,3265.87 L1.2
USBCVbus: C4.1 J1.A9 J1.B9 R4.1 R5.2 U1.6 | length 1166.4
  Top Layer w15: J1.B9 5045.31,1340.32 5100,1395 5165,1395 ; U1.6 5078.58,1660 5150,1660 5190,1620 ; J1.A9 5165,1395 ; R4.1 5192.8,1772.2 5192.8,1588.98 R5.2 5223.82,1586.18 5260,1550 5260,1490 5165,1395 ; R4.1@5195.59,1776.97 5233.62,1815 5370,1815 5378.79,1806.21 5378.79,1793.79 5370,1785 5368.03,1785 5350,1766.97 C4.1
Vbat: 2.5VBoost.1 2.5VBoost.10 3.4 5VBoost.6 5VBoost.7 5VBoost.15 "Undervoltage MOSFET1.3" C3.2 Cin1.2 Cinx1.2 L1.1 | length 862.1
  Top Layer w15: 2.5VBoost.10 2.5VBoost.1 5180.43,3014.04 5200,2994.47 v1(5200,2985) ; C3.2@5278.03,2951.26 C3.2 5281.97,2951.26 v1@5318.23,2915 ; 5340,2280 5340,2281.97 5371.33,2313.3 5393.3,2313.3 v1(5400,2320) ; v1(5665,3070) 5665,3062.13 5702.13,3025 Cinx1.2 ; v1(5700,3300) 5701.71,3298.29 5781.32,3298.29 Cin1.2@5783.03,3296.57 ; v1(5960,3157.5) 5966.7,3150.8 5966.7,3133.3 5978.69,3133.3 5VBoost.15@6023.9,3088.09 ; 5VBoost.15 5VBoost.15@6023.9,3088.09 ; 5VBoost.6 6057.36,3093.03 6053.78,3089.45 6025.26,3089.45 5VBoost.15@6023.9,3088.09 ; v1(6380,3270) 6460.1,3270 6487.05,3296.95 L1.1 6487.05,3353.05 6460.1,3380 v1(6380,3380)
  other v1: 6905,2655 5335,2900
Vcc: 5VBoost.11 Cvcc1.2 | length 329.3
  Top Layer w15: Cvcc1.2 5860,2895 5970,3005 6013.05,3005 6016.03,3007.98 5VBoost.11@6022.54,3007.98
Vout: 3.3 5VBoost.5 5VBoost.14 "Voltage Inverter1.5" Cout1.2 pad.1 R1.2 Rfbt1.2 | length 5254.7
  Top Layer w15: R1.2 4988.82,1906.97 4850,2045.79 4850,2415 5037.5,2602.5 5227.5,2602.5 5415,2790 5535.77,2790 5540.39,2794.61 5634.61,2794.61 v1(5635,2795) ; 5VBoost.5 6080,3280 6160,3360 6160,3440.28 6080,3520.28 6080,3525.2 ; 5VBoost.14 6121.34,3063.27 6175,3116.93 v1(6175,3120) ; pad.1 6464.27,1567.42 6464.27,1694.27 v1(6465,1695) ; v1(6520,2710) 6522.5,2707.5 6522.5,2555.65 Cout1.2 6829.93,2553.15 6853.08,2530 3.3
  Bottom Layer w15: v1(5635,2795) 5960,3120 v1(6175,3120) 6175,3055 v1(6520,2710) 6520,2631.97 6771.97,2380 6773.03,2380 6807.5,2345.53 6807.5,2196.25 6465,1853.75 v1(6465,1695)
pads on no net: UV.3

## Polygon pours and split planes (outlines as drawn)
GND on GND "GND_L03_P000" (solid, pour order 0): 4790,3850 4810,3830 7085,3830 7085,955 7065,935 7045,955 4785,955
Vbat on 5V "VBAT_L02_P001" (solid, pour order 1): 4760,3855 7020,3855 7020,980 7000,1000 4725,1000

## Silkscreen, mask and mechanical layers (free items; w line width, h text height)
Top Overlay:
  lines w3.94: 6315.91,1611.57 6315.91,1566.69 6315.91,1611.57 ; 6315.91,1611.57 6886.77,1611.57 ; 6315.91,1611.57 6886.77,1611.57 ; 6886.77,1611.57 6886.77,1566.69 6886.77,1611.57
  lines w7.87: 6459.61,1661.18 ccw(c6461.57,1661.18) 6463.54,1661.18 ; 6459.61,1661.18 cw(c6461.57,1661.18) 6463.54,1661.18 ; 6459.61,1661.18 ccw(c6461.57,1661.18) 6463.54,1661.18
Bottom Overlay:
  text "Battery Management and" at 6621.36,3480.44 h120
  text "Power Distribution System" at 6643.85,3332.03 h120
  text "Designed By :" at 6269.31,3178.52 h60
  text "Joshua Washburn" at 6349.28,3045 h60
Mechanical 13:
  lines w5: 4929.02,1303.23 5280.98,1303.23
  lines w7.87: 6315.91,1090 6315.91,1611.57 6886.77,1611.57 6886.77,1085
Mechanical 15:
  lines w1.97: 4905.39,1342.6 5304.61,1342.6
  lines w3.94: 6235.39,1702.52 6967.28,1702.52